# Altium PCB ZIF_to_2xZIF.PcbDoc (part 1 of 3)
Units mil, origin at the board's own origin, x right, y up, seen from the top; angles counter-clockwise.
Board outline 1622.05 x 16535.43 mil, 2 copper layers (Top Layer, Bottom Layer), stack 3.189 mil thick; 3 components, 51 nets, 153 pads, 51 vias.
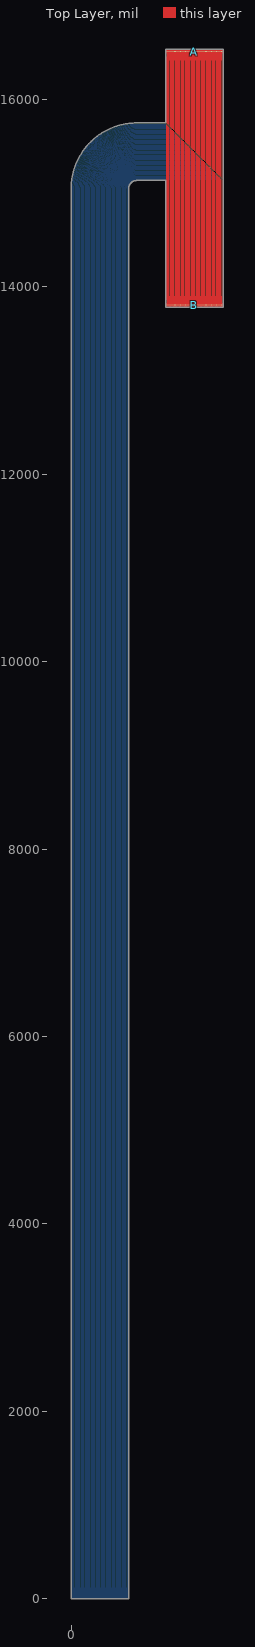
[diagram p0: Top Layer view]
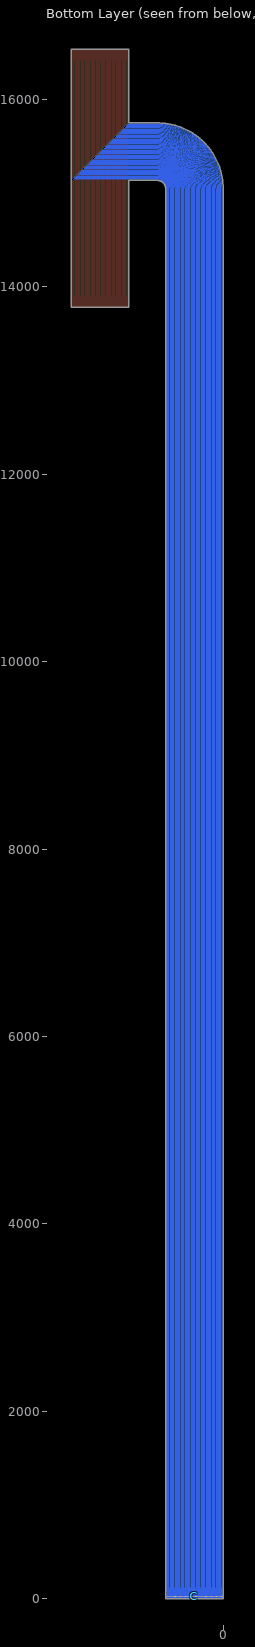
[diagram p1: Bottom Layer view, seen from below]

## Layer stack, top to bottom
Top Solder: solder mask 0.9843, Polyimide coverlay + adhesive, Dk 3.5
Top Layer: signal copper 0.7087
Polyimide core + adhesive: dielectric 1.7717, Polyimide + adhesive, Dk 3.5
Bottom Layer: signal copper 0.7087
Bottom Solder: solder mask 0.9843, Polyimide coverlay + adhesive, Dk 3.5

## Board outline
0,15047.24 0.11,15059.47 0.43,15071.7 0.96,15083.92 1.71,15096.13 2.67,15108.32 3.84,15120.5 5.22,15132.65 6.82,15144.77 8.63,15156.87 10.65,15168.93 12.88,15180.96 15.31,15192.95 17.96,15204.89 20.82,15216.78 23.88,15228.62 27.15,15240.41 30.62,15252.13 34.3,15263.8 38.18,15275.4 42.26,15286.93 46.55,15298.38 51.03,15309.76 55.71,15321.06 60.59,15332.28 65.66,15343.41 70.92,15354.45 76.38,15365.39 82.03,15376.24 87.86,15386.99 93.89,15397.64 100.1,15408.18 106.49,15418.6 113.06,15428.92 119.81,15439.12 126.74,15449.2 133.84,15459.16 141.11,15468.99 148.56,15478.69 156.17,15488.26 163.95,15497.7 171.9,15507 180,15516.16 188.26,15525.18 196.68,15534.05 205.26,15542.78 213.98,15551.35 222.85,15559.77 231.87,15568.03 241.03,15576.14 250.33,15584.08 259.77,15591.86 269.34,15599.47 279.04,15606.92 288.87,15614.19 298.83,15621.3 308.91,15628.22 319.11,15634.97 329.43,15641.55 339.86,15647.94 350.39,15654.14 361.04,15660.17 371.79,15666 382.64,15671.65 393.58,15677.11 404.62,15682.37 415.75,15687.45 426.97,15692.32 438.27,15697 449.65,15701.49 461.1,15705.77 472.63,15709.85 484.23,15713.73 495.9,15717.41 507.62,15720.88 519.41,15724.15 531.25,15727.22 543.14,15730.07 555.09,15732.72 567.07,15735.16 579.1,15737.39 591.16,15739.4 603.26,15741.21 615.38,15742.81 627.54,15744.19 639.71,15745.36 651.9,15746.32 664.11,15747.07 676.33,15747.6 688.56,15747.92 700.79,15748.03 1007.87,15748.03 1007.87,16535.43 1622.05,16535.43 1622.05,15748.03 1622.05,15133.86 1622.05,13779.53 1007.87,13779.53 1007.87,15133.86 700.79,15133.86 699.28,15133.85 697.76,15133.81 696.25,15133.74 694.75,15133.65 693.24,15133.53 691.73,15133.38 690.23,15133.21 688.73,15133.02 687.24,15132.79 685.75,15132.54 684.26,15132.27 682.78,15131.97 681.3,15131.64 679.83,15131.29 678.37,15130.91 676.91,15130.5 675.46,15130.07 674.02,15129.62 672.59,15129.14 671.16,15128.63 669.75,15128.11 668.34,15127.55 666.94,15126.97 665.56,15126.37 664.18,15125.74 662.82,15125.09 661.47,15124.42 660.12,15123.72 658.8,15123 657.48,15122.25 656.18,15121.49 654.89,15120.7 653.61,15119.88 652.35,15119.05 651.11,15118.19 649.88,15117.32 648.66,15116.42 647.46,15115.5 646.28,15114.56 645.11,15113.59 643.96,15112.61 642.83,15111.61 641.72,15110.59 640.62,15109.55 639.54,15108.49 638.48,15107.41 637.44,15106.31 636.42,15105.2 635.42,15104.07 634.44,15102.92 633.48,15101.75 632.53,15100.57 631.61,15099.37 630.72,15098.15 629.84,15096.92 628.98,15095.68 628.15,15094.42 627.33,15093.14 626.54,15091.85 625.78,15090.55 625.03,15089.24 624.31,15087.91 623.61,15086.57 622.94,15085.21 622.29,15083.85 621.66,15082.47 621.06,15081.09 620.48,15079.69 619.93,15078.28 619.4,15076.87 618.89,15075.44 618.41,15074.01 617.96,15072.57 617.53,15071.12 617.12,15069.66 616.75,15068.2 616.39,15066.73 616.07,15065.25 615.76,15063.77 615.49,15062.28 615.24,15060.79 615.02,15059.3 614.82,15057.8 614.65,15056.3 614.5,15054.79 614.38,15053.29 614.29,15051.78 614.23,15050.27 614.19,15048.76 614.17,15047.24 614.17,0 0,0

## Design rules (kind name [scope] priority, off if disabled: settings)
Clearance [All] p1: gap=2.78 ignorepadtopadclearanceinfootprint=FALSE
PolygonConnect [All] p1: connectstyle=Relief reliefconductorwidth=10 reliefentries=4 polygonreliefangle="90 Angle" airgapwidth=10
RoutingVias [All] p1: holewidth=28 width=50 viastyle="Through Hole" minholewidth=28 minwidth=50 maxholewidth=28 maxwidth=50
SolderMaskExpansion [All] p1: expansion=0 istentingtop=FALSE
Width [All] p1: maxlimit=11.81 minlimit=3.94 preferedwidth=10 toplayer_prefwidth=7.87 minimp=50.000000 maximp=50.000000 favimp=50.000000
30 further rules are at their usual default settings.

## Components (designator, comment, footprint, x,y, rotation, side; value= is the part's Value field where it differs from the comment)
A "Comment" FPC51_P030_STAGGERED#1 1314.96,16535.43 r0 top
B "Comment" FPC51_P030_STAGGERED#2 1314.96,13779.53 r0 top
C "Comment" FPC51_P030_STAGGERED#1 307.09,0 r0 bottom

## Footprints (in the part's own frame and the unit in brackets; to place one, negate y for a bottom-side part, rotate by r counter-clockwise, add the part's x,y. Pads: shape width x height; smd on the part's side, far side on the other; paste and mask are expansions set on the pad)
FPC51_P030_STAGGERED#1 [mm]
  rect 0.1x0.3 smd paste-2539.97 mask+0: 1(-7.5,-0.65) 2(-7.2,-0.65) 3(-6.9,-0.65) 4(-6.6,-0.65) 5(-6.3,-0.65) 6(-6,-0.65) 7(-5.7,-0.65) 8(-5.4,-0.65) 9(-5.1,-0.65) 10(-4.8,-0.65) 11(-4.5,-0.65) 12(-4.2,-0.65) 13(-3.9,-0.65) 14(-3.6,-0.65) 15(-3.3,-0.65) 16(-3,-0.65) 17(-2.7,-0.65) 18(-2.4,-0.65) 19(-2.1,-0.65) 20(-1.8,-0.65) 21(-1.5,-0.65) 22(-1.2,-0.65) 23(-0.9,-0.65) 24(-0.6,-0.65) 25(-0.3,-0.65) 26(0,-0.65) 27(0.3,-0.65) 28(0.6,-0.65) 29(0.9,-0.65) 30(1.2,-0.65) 31(1.5,-0.65) 32(1.8,-0.65) 33(2.1,-0.65) 34(2.4,-0.65) 35(2.7,-0.65) 36(3,-0.65) 37(3.3,-0.65) 38(3.6,-0.65) 39(3.9,-0.65) 40(4.2,-0.65) 41(4.5,-0.65) 42(4.8,-0.65) 43(5.1,-0.65) 44(5.4,-0.65) 45(5.7,-0.65) 46(6,-0.65) 47(6.3,-0.65) 48(6.6,-0.65) 49(6.9,-0.65) 50(7.2,-0.65) 51(7.5,-0.65)
  Top Layer region: 7.55,0 7.55,-0.15 7.65,-0.25 7.65,-1.1 7.55,-1.2 7.55,-2 7.6,-2.1 7.6,-3.05 7.4,-3.05 7.4,-2.1 7.45,-2 7.45,-1.2 7.35,-1.1 7.35,-0.25 7.45,-0.15 7.45,0
  Top Layer region: 7.25,0 7.25,-1.1 7.35,-1.2 7.35,-2 7.3,-2.1 7.3,-3.05 7.1,-3.05 7.1,-2.1 7.05,-2 7.05,-1.2 7.15,-1.1 7.15,0
  Top Layer region: 6.95,0 6.95,-0.15 7.05,-0.25 7.05,-1.1 6.95,-1.2 6.95,-2 7,-2.1 7,-3.05 6.8,-3.05 6.8,-2.1 6.85,-2 6.85,-1.2 6.75,-1.1 6.75,-0.25 6.85,-0.15 6.85,0
  Top Layer region: 6.65,0 6.65,-1.1 6.75,-1.2 6.75,-2 6.7,-2.1 6.7,-3.05 6.5,-3.05 6.5,-2.1 6.45,-2 6.45,-1.2 6.55,-1.1 6.55,0
  Top Layer region: 6.35,0 6.35,-0.15 6.45,-0.25 6.45,-1.1 6.35,-1.2 6.35,-2 6.4,-2.1 6.4,-3.05 6.2,-3.05 6.2,-2.1 6.25,-2 6.25,-1.2 6.15,-1.1 6.15,-0.25 6.25,-0.15 6.25,0
  Top Layer region: 6.05,0 6.05,-1.1 6.15,-1.2 6.15,-2 6.1,-2.1 6.1,-3.05 5.9,-3.05 5.9,-2.1 5.85,-2 5.85,-1.2 5.95,-1.1 5.95,0
  Top Layer region: 5.75,0 5.75,-0.15 5.85,-0.25 5.85,-1.1 5.75,-1.2 5.75,-2 5.8,-2.1 5.8,-3.05 5.6,-3.05 5.6,-2.1 5.65,-2 5.65,-1.2 5.55,-1.1 5.55,-0.25 5.65,-0.15 5.65,0
  Top Layer region: 5.45,0 5.45,-1.1 5.55,-1.2 5.55,-2 5.5,-2.1 5.5,-3.05 5.3,-3.05 5.3,-2.1 5.25,-2 5.25,-1.2 5.35,-1.1 5.35,0
  Top Layer region: 5.15,0 5.15,-0.15 5.25,-0.25 5.25,-1.1 5.15,-1.2 5.15,-2 5.2,-2.1 5.2,-3.05 5,-3.05 5,-2.1 5.05,-2 5.05,-1.2 4.95,-1.1 4.95,-0.25 5.05,-0.15 5.05,0
  Top Layer region: 4.85,0 4.85,-1.1 4.95,-1.2 4.95,-2 4.9,-2.1 4.9,-3.05 4.7,-3.05 4.7,-2.1 4.65,-2 4.65,-1.2 4.75,-1.1 4.75,0
  Top Layer region: 4.55,0 4.55,-0.15 4.65,-0.25 4.65,-1.1 4.55,-1.2 4.55,-2 4.6,-2.1 4.6,-3.05 4.4,-3.05 4.4,-2.1 4.45,-2 4.45,-1.2 4.35,-1.1 4.35,-0.25 4.45,-0.15 4.45,0
  Top Layer region: 4.25,0 4.25,-1.1 4.35,-1.2 4.35,-2 4.3,-2.1 4.3,-3.05 4.1,-3.05 4.1,-2.1 4.05,-2 4.05,-1.2 4.15,-1.1 4.15,0
  Top Layer region: 3.95,0 3.95,-0.15 4.05,-0.25 4.05,-1.1 3.95,-1.2 3.95,-2 4,-2.1 4,-3.05 3.8,-3.05 3.8,-2.1 3.85,-2 3.85,-1.2 3.75,-1.1 3.75,-0.25 3.85,-0.15 3.85,0
  Top Layer region: 3.65,0 3.65,-1.1 3.75,-1.2 3.75,-2 3.7,-2.1 3.7,-3.05 3.5,-3.05 3.5,-2.1 3.45,-2 3.45,-1.2 3.55,-1.1 3.55,0
  Top Layer region: 3.35,0 3.35,-0.15 3.45,-0.25 3.45,-1.1 3.35,-1.2 3.35,-2 3.4,-2.1 3.4,-3.05 3.2,-3.05 3.2,-2.1 3.25,-2 3.25,-1.2 3.15,-1.1 3.15,-0.25 3.25,-0.15 3.25,0
  Top Layer region: 3.05,0 3.05,-1.1 3.15,-1.2 3.15,-2 3.1,-2.1 3.1,-3.05 2.9,-3.05 2.9,-2.1 2.85,-2 2.85,-1.2 2.95,-1.1 2.95,0
  Top Layer region: 2.75,0 2.75,-0.15 2.85,-0.25 2.85,-1.1 2.75,-1.2 2.75,-2 2.8,-2.1 2.8,-3.05 2.6,-3.05 2.6,-2.1 2.65,-2 2.65,-1.2 2.55,-1.1 2.55,-0.25 2.65,-0.15 2.65,0
  Top Layer region: 2.45,0 2.45,-1.1 2.55,-1.2 2.55,-2 2.5,-2.1 2.5,-3.05 2.3,-3.05 2.3,-2.1 2.25,-2 2.25,-1.2 2.35,-1.1 2.35,0
  Top Layer region: 2.15,0 2.15,-0.15 2.25,-0.25 2.25,-1.1 2.15,-1.2 2.15,-2 2.2,-2.1 2.2,-3.05 2,-3.05 2,-2.1 2.05,-2 2.05,-1.2 1.95,-1.1 1.95,-0.25 2.05,-0.15 2.05,0
  Top Layer region: 1.85,0 1.85,-1.1 1.95,-1.2 1.95,-2 1.9,-2.1 1.9,-3.05 1.7,-3.05 1.7,-2.1 1.65,-2 1.65,-1.2 1.75,-1.1 1.75,0
  Top Layer region: 1.55,0 1.55,-0.15 1.65,-0.25 1.65,-1.1 1.55,-1.2 1.55,-2 1.6,-2.1 1.6,-3.05 1.4,-3.05 1.4,-2.1 1.45,-2 1.45,-1.2 1.35,-1.1 1.35,-0.25 1.45,-0.15 1.45,0
  Top Layer region: 1.25,0 1.25,-1.1 1.35,-1.2 1.35,-2 1.3,-2.1 1.3,-3.05 1.1,-3.05 1.1,-2.1 1.05,-2 1.05,-1.2 1.15,-1.1 1.15,0
  Top Layer region: 0.95,0 0.95,-0.15 1.05,-0.25 1.05,-1.1 0.95,-1.2 0.95,-2 1,-2.1 1,-3.05 0.8,-3.05 0.8,-2.1 0.85,-2 0.85,-1.2 0.75,-1.1 0.75,-0.25 0.85,-0.15 0.85,0
  Top Layer region: 0.65,0 0.65,-1.1 0.75,-1.2 0.75,-2 0.7,-2.1 0.7,-3.05 0.5,-3.05 0.5,-2.1 0.45,-2 0.45,-1.2 0.55,-1.1 0.55,0
  Top Layer region: 0.35,0 0.35,-0.15 0.45,-0.25 0.45,-1.1 0.35,-1.2 0.35,-2 0.4,-2.1 0.4,-3.05 0.2,-3.05 0.2,-2.1 0.25,-2 0.25,-1.2 0.15,-1.1 0.15,-0.25 0.25,-0.15 0.25,0
  Top Layer region: 0.05,0 0.05,-1.1 0.15,-1.2 0.15,-2 0.1,-2.1 0.1,-3.05 -0.1,-3.05 -0.1,-2.1 -0.15,-2 -0.15,-1.2 -0.05,-1.1 -0.05,0
  Top Layer region: -0.25,0 -0.25,-0.15 -0.15,-0.25 -0.15,-1.1 -0.25,-1.2 -0.25,-2 -0.2,-2.1 -0.2,-3.05 -0.4,-3.05 -0.4,-2.1 -0.35,-2 -0.35,-1.2 -0.45,-1.1 -0.45,-0.25 -0.35,-0.15 -0.35,0
  Top Layer region: -0.55,0 -0.55,-1.1 -0.45,-1.2 -0.45,-2 -0.5,-2.1 -0.5,-3.05 -0.7,-3.05 -0.7,-2.1 -0.75,-2 -0.75,-1.2 -0.65,-1.1 -0.65,0
  Top Layer region: -0.85,0 -0.85,-0.15 -0.75,-0.25 -0.75,-1.1 -0.85,-1.2 -0.85,-2 -0.8,-2.1 -0.8,-3.05 -1,-3.05 -1,-2.1 -0.95,-2 -0.95,-1.2 -1.05,-1.1 -1.05,-0.25 -0.95,-0.15 -0.95,0
  Top Layer region: -1.15,0 -1.15,-1.1 -1.05,-1.2 -1.05,-2 -1.1,-2.1 -1.1,-3.05 -1.3,-3.05 -1.3,-2.1 -1.35,-2 -1.35,-1.2 -1.25,-1.1 -1.25,0
  Top Layer region: -1.45,0 -1.45,-0.15 -1.35,-0.25 -1.35,-1.1 -1.45,-1.2 -1.45,-2 -1.4,-2.1 -1.4,-3.05 -1.6,-3.05 -1.6,-2.1 -1.55,-2 -1.55,-1.2 -1.65,-1.1 -1.65,-0.25 -1.55,-0.15 -1.55,0
  Top Layer region: -1.75,0 -1.75,-1.1 -1.65,-1.2 -1.65,-2 -1.7,-2.1 -1.7,-3.05 -1.9,-3.05 -1.9,-2.1 -1.95,-2 -1.95,-1.2 -1.85,-1.1 -1.85,0
  Top Layer region: -2.05,0 -2.05,-0.15 -1.95,-0.25 -1.95,-1.1 -2.05,-1.2 -2.05,-2 -2,-2.1 -2,-3.05 -2.2,-3.05 -2.2,-2.1 -2.15,-2 -2.15,-1.2 -2.25,-1.1 -2.25,-0.25 -2.15,-0.15 -2.15,0
  Top Layer region: -2.35,0 -2.35,-1.1 -2.25,-1.2 -2.25,-2 -2.3,-2.1 -2.3,-3.05 -2.5,-3.05 -2.5,-2.1 -2.55,-2 -2.55,-1.2 -2.45,-1.1 -2.45,0
  Top Layer region: -2.65,0 -2.65,-0.15 -2.55,-0.25 -2.55,-1.1 -2.65,-1.2 -2.65,-2 -2.6,-2.1 -2.6,-3.05 -2.8,-3.05 -2.8,-2.1 -2.75,-2 -2.75,-1.2 -2.85,-1.1 -2.85,-0.25 -2.75,-0.15 -2.75,0
  Top Layer region: -2.95,0 -2.95,-1.1 -2.85,-1.2 -2.85,-2 -2.9,-2.1 -2.9,-3.05 -3.1,-3.05 -3.1,-2.1 -3.15,-2 -3.15,-1.2 -3.05,-1.1 -3.05,0
  Top Layer region: -3.25,0 -3.25,-0.15 -3.15,-0.25 -3.15,-1.1 -3.25,-1.2 -3.25,-2 -3.2,-2.1 -3.2,-3.05 -3.4,-3.05 -3.4,-2.1 -3.35,-2 -3.35,-1.2 -3.45,-1.1 -3.45,-0.25 -3.35,-0.15 -3.35,0
  Top Layer region: -3.55,0 -3.55,-1.1 -3.45,-1.2 -3.45,-2 -3.5,-2.1 -3.5,-3.05 -3.7,-3.05 -3.7,-2.1 -3.75,-2 -3.75,-1.2 -3.65,-1.1 -3.65,0
  Top Layer region: -3.85,0 -3.85,-0.15 -3.75,-0.25 -3.75,-1.1 -3.85,-1.2 -3.85,-2 -3.8,-2.1 -3.8,-3.05 -4,-3.05 -4,-2.1 -3.95,-2 -3.95,-1.2 -4.05,-1.1 -4.05,-0.25 -3.95,-0.15 -3.95,0
  Top Layer region: -4.15,0 -4.15,-1.1 -4.05,-1.2 -4.05,-2 -4.1,-2.1 -4.1,-3.05 -4.3,-3.05 -4.3,-2.1 -4.35,-2 -4.35,-1.2 -4.25,-1.1 -4.25,0
  Top Layer region: -4.45,0 -4.45,-0.15 -4.35,-0.25 -4.35,-1.1 -4.45,-1.2 -4.45,-2 -4.4,-2.1 -4.4,-3.05 -4.6,-3.05 -4.6,-2.1 -4.55,-2 -4.55,-1.2 -4.65,-1.1 -4.65,-0.25 -4.55,-0.15 -4.55,0
  Top Layer region: -4.75,0 -4.75,-1.1 -4.65,-1.2 -4.65,-2 -4.7,-2.1 -4.7,-3.05 -4.9,-3.05 -4.9,-2.1 -4.95,-2 -4.95,-1.2 -4.85,-1.1 -4.85,0
  Top Layer region: -5.05,0 -5.05,-0.15 -4.95,-0.25 -4.95,-1.1 -5.05,-1.2 -5.05,-2 -5,-2.1 -5,-3.05 -5.2,-3.05 -5.2,-2.1 -5.15,-2 -5.15,-1.2 -5.25,-1.1 -5.25,-0.25 -5.15,-0.15 -5.15,0
  Top Layer region: -5.35,0 -5.35,-1.1 -5.25,-1.2 -5.25,-2 -5.3,-2.1 -5.3,-3.05 -5.5,-3.05 -5.5,-2.1 -5.55,-2 -5.55,-1.2 -5.45,-1.1 -5.45,0
  Top Layer region: -5.65,0 -5.65,-0.15 -5.55,-0.25 -5.55,-1.1 -5.65,-1.2 -5.65,-2 -5.6,-2.1 -5.6,-3.05 -5.8,-3.05 -5.8,-2.1 -5.75,-2 -5.75,-1.2 -5.85,-1.1 -5.85,-0.25 -5.75,-0.15 -5.75,0
  Top Layer region: -5.95,0 -5.95,-1.1 -5.85,-1.2 -5.85,-2 -5.9,-2.1 -5.9,-3.05 -6.1,-3.05 -6.1,-2.1 -6.15,-2 -6.15,-1.2 -6.05,-1.1 -6.05,0
  Top Layer region: -6.25,0 -6.25,-0.15 -6.15,-0.25 -6.15,-1.1 -6.25,-1.2 -6.25,-2 -6.2,-2.1 -6.2,-3.05 -6.4,-3.05 -6.4,-2.1 -6.35,-2 -6.35,-1.2 -6.45,-1.1 -6.45,-0.25 -6.35,-0.15 -6.35,0
  Top Layer region: -6.55,0 -6.55,-1.1 -6.45,-1.2 -6.45,-2 -6.5,-2.1 -6.5,-3.05 -6.7,-3.05 -6.7,-2.1 -6.75,-2 -6.75,-1.2 -6.65,-1.1 -6.65,0
  Top Layer region: -6.85,0 -6.85,-0.15 -6.75,-0.25 -6.75,-1.1 -6.85,-1.2 -6.85,-2 -6.8,-2.1 -6.8,-3.05 -7,-3.05 -7,-2.1 -6.95,-2 -6.95,-1.2 -7.05,-1.1 -7.05,-0.25 -6.95,-0.15 -6.95,0
  Top Layer region: -7.15,0 -7.15,-1.1 -7.05,-1.2 -7.05,-2 -7.1,-2.1 -7.1,-3.05 -7.3,-3.05 -7.3,-2.1 -7.35,-2 -7.35,-1.2 -7.25,-1.1 -7.25,0
  Top Layer region: -7.45,0 -7.45,-0.15 -7.35,-0.25 -7.35,-1.1 -7.45,-1.2 -7.45,-2 -7.4,-2.1 -7.4,-3.05 -7.6,-3.05 -7.6,-2.1 -7.55,-2 -7.55,-1.2 -7.65,-1.1 -7.65,-0.25 -7.55,-0.15 -7.55,0
FPC51_P030_STAGGERED#2 [mm]
  rect 0.1x0.3 smd paste-2539.97 mask+0: 1(-7.5,0.65) 2(-7.2,0.65) 3(-6.9,0.65) 4(-6.6,0.65) 5(-6.3,0.65) 6(-6,0.65) 7(-5.7,0.65) 8(-5.4,0.65) 9(-5.1,0.65) 10(-4.8,0.65) 11(-4.5,0.65) 12(-4.2,0.65) 13(-3.9,0.65) 14(-3.6,0.65) 15(-3.3,0.65) 16(-3,0.65) 17(-2.7,0.65) 18(-2.4,0.65) 19(-2.1,0.65) 20(-1.8,0.65) 21(-1.5,0.65) 22(-1.2,0.65) 23(-0.9,0.65) 24(-0.6,0.65) 25(-0.3,0.65) 26(0,0.65) 27(0.3,0.65) 28(0.6,0.65) 29(0.9,0.65) 30(1.2,0.65) 31(1.5,0.65) 32(1.8,0.65) 33(2.1,0.65) 34(2.4,0.65) 35(2.7,0.65) 36(3,0.65) 37(3.3,0.65) 38(3.6,0.65) 39(3.9,0.65) 40(4.2,0.65) 41(4.5,0.65) 42(4.8,0.65) 43(5.1,0.65) 44(5.4,0.65) 45(5.7,0.65) 46(6,0.65) 47(6.3,0.65) 48(6.6,0.65) 49(6.9,0.65) 50(7.2,0.65) 51(7.5,0.65)
  Top Layer region: 7.55,0 7.55,0.15 7.65,0.25 7.65,1.1 7.55,1.2 7.55,2 7.6,2.1 7.6,3.05 7.4,3.05 7.4,2.1 7.45,2 7.45,1.2 7.35,1.1 7.35,0.25 7.45,0.15 7.45,0
  Top Layer region: 7.25,0 7.25,1.1 7.35,1.2 7.35,2 7.3,2.1 7.3,3.05 7.1,3.05 7.1,2.1 7.05,2 7.05,1.2 7.15,1.1 7.15,0
  Top Layer region: 6.95,0 6.95,0.15 7.05,0.25 7.05,1.1 6.95,1.2 6.95,2 7,2.1 7,3.05 6.8,3.05 6.8,2.1 6.85,2 6.85,1.2 6.75,1.1 6.75,0.25 6.85,0.15 6.85,0
  Top Layer region: 6.65,0 6.65,1.1 6.75,1.2 6.75,2 6.7,2.1 6.7,3.05 6.5,3.05 6.5,2.1 6.45,2 6.45,1.2 6.55,1.1 6.55,0
  Top Layer region: 6.35,0 6.35,0.15 6.45,0.25 6.45,1.1 6.35,1.2 6.35,2 6.4,2.1 6.4,3.05 6.2,3.05 6.2,2.1 6.25,2 6.25,1.2 6.15,1.1 6.15,0.25 6.25,0.15 6.25,0
  Top Layer region: 6.05,0 6.05,1.1 6.15,1.2 6.15,2 6.1,2.1 6.1,3.05 5.9,3.05 5.9,2.1 5.85,2 5.85,1.2 5.95,1.1 5.95,0
  Top Layer region: 5.75,0 5.75,0.15 5.85,0.25 5.85,1.1 5.75,1.2 5.75,2 5.8,2.1 5.8,3.05 5.6,3.05 5.6,2.1 5.65,2 5.65,1.2 5.55,1.1 5.55,0.25 5.65,0.15 5.65,0
  Top Layer region: 5.45,0 5.45,1.1 5.55,1.2 5.55,2 5.5,2.1 5.5,3.05 5.3,3.05 5.3,2.1 5.25,2 5.25,1.2 5.35,1.1 5.35,0
  Top Layer region: 5.15,0 5.15,0.15 5.25,0.25 5.25,1.1 5.15,1.2 5.15,2 5.2,2.1 5.2,3.05 5,3.05 5,2.1 5.05,2 5.05,1.2 4.95,1.1 4.95,0.25 5.05,0.15 5.05,0
  Top Layer region: 4.85,0 4.85,1.1 4.95,1.2 4.95,2 4.9,2.1 4.9,3.05 4.7,3.05 4.7,2.1 4.65,2 4.65,1.2 4.75,1.1 4.75,0
  Top Layer region: 4.55,0 4.55,0.15 4.65,0.25 4.65,1.1 4.55,1.2 4.55,2 4.6,2.1 4.6,3.05 4.4,3.05 4.4,2.1 4.45,2 4.45,1.2 4.35,1.1 4.35,0.25 4.45,0.15 4.45,0
  Top Layer region: 4.25,0 4.25,1.1 4.35,1.2 4.35,2 4.3,2.1 4.3,3.05 4.1,3.05 4.1,2.1 4.05,2 4.05,1.2 4.15,1.1 4.15,0
  Top Layer region: 3.95,0 3.95,0.15 4.05,0.25 4.05,1.1 3.95,1.2 3.95,2 4,2.1 4,3.05 3.8,3.05 3.8,2.1 3.85,2 3.85,1.2 3.75,1.1 3.75,0.25 3.85,0.15 3.85,0
  Top Layer region: 3.65,0 3.65,1.1 3.75,1.2 3.75,2 3.7,2.1 3.7,3.05 3.5,3.05 3.5,2.1 3.45,2 3.45,1.2 3.55,1.1 3.55,0
  Top Layer region: 3.35,0 3.35,0.15 3.45,0.25 3.45,1.1 3.35,1.2 3.35,2 3.4,2.1 3.4,3.05 3.2,3.05 3.2,2.1 3.25,2 3.25,1.2 3.15,1.1 3.15,0.25 3.25,0.15 3.25,0
  Top Layer region: 3.05,0 3.05,1.1 3.15,1.2 3.15,2 3.1,2.1 3.1,3.05 2.9,3.05 2.9,2.1 2.85,2 2.85,1.2 2.95,1.1 2.95,0
  Top Layer region: 2.75,0 2.75,0.15 2.85,0.25 2.85,1.1 2.75,1.2 2.75,2 2.8,2.1 2.8,3.05 2.6,3.05 2.6,2.1 2.65,2 2.65,1.2 2.55,1.1 2.55,0.25 2.65,0.15 2.65,0
  Top Layer region: 2.45,0 2.45,1.1 2.55,1.2 2.55,2 2.5,2.1 2.5,3.05 2.3,3.05 2.3,2.1 2.25,2 2.25,1.2 2.35,1.1 2.35,0
  Top Layer region: 2.15,0 2.15,0.15 2.25,0.25 2.25,1.1 2.15,1.2 2.15,2 2.2,2.1 2.2,3.05 2,3.05 2,2.1 2.05,2 2.05,1.2 1.95,1.1 1.95,0.25 2.05,0.15 2.05,0
  Top Layer region: 1.85,0 1.85,1.1 1.95,1.2 1.95,2 1.9,2.1 1.9,3.05 1.7,3.05 1.7,2.1 1.65,2 1.65,1.2 1.75,1.1 1.75,0
  Top Layer region: 1.55,0 1.55,0.15 1.65,0.25 1.65,1.1 1.55,1.2 1.55,2 1.6,2.1 1.6,3.05 1.4,3.05 1.4,2.1 1.45,2 1.45,1.2 1.35,1.1 1.35,0.25 1.45,0.15 1.45,0
  Top Layer region: 1.25,0 1.25,1.1 1.35,1.2 1.35,2 1.3,2.1 1.3,3.05 1.1,3.05 1.1,2.1 1.05,2 1.05,1.2 1.15,1.1 1.15,0
  Top Layer region: 0.95,0 0.95,0.15 1.05,0.25 1.05,1.1 0.95,1.2 0.95,2 1,2.1 1,3.05 0.8,3.05 0.8,2.1 0.85,2 0.85,1.2 0.75,1.1 0.75,0.25 0.85,0.15 0.85,0
  Top Layer region: 0.65,0 0.65,1.1 0.75,1.2 0.75,2 0.7,2.1 0.7,3.05 0.5,3.05 0.5,2.1 0.45,2 0.45,1.2 0.55,1.1 0.55,0
  Top Layer region: 0.35,0 0.35,0.15 0.45,0.25 0.45,1.1 0.35,1.2 0.35,2 0.4,2.1 0.4,3.05 0.2,3.05 0.2,2.1 0.25,2 0.25,1.2 0.15,1.1 0.15,0.25 0.25,0.15 0.25,0
  Top Layer region: 0.05,0 0.05,1.1 0.15,1.2 0.15,2 0.1,2.1 0.1,3.05 -0.1,3.05 -0.1,2.1 -0.15,2 -0.15,1.2 -0.05,1.1 -0.05,0
  Top Layer region: -0.25,0 -0.25,0.15 -0.15,0.25 -0.15,1.1 -0.25,1.2 -0.25,2 -0.2,2.1 -0.2,3.05 -0.4,3.05 -0.4,2.1 -0.35,2 -0.35,1.2 -0.45,1.1 -0.45,0.25 -0.35,0.15 -0.35,0
  Top Layer region: -0.55,0 -0.55,1.1 -0.45,1.2 -0.45,2 -0.5,2.1 -0.5,3.05 -0.7,3.05 -0.7,2.1 -0.75,2 -0.75,1.2 -0.65,1.1 -0.65,0
  Top Layer region: -0.85,0 -0.85,0.15 -0.75,0.25 -0.75,1.1 -0.85,1.2 -0.85,2 -0.8,2.1 -0.8,3.05 -1,3.05 -1,2.1 -0.95,2 -0.95,1.2 -1.05,1.1 -1.05,0.25 -0.95,0.15 -0.95,0
  Top Layer region: -1.15,0 -1.15,1.1 -1.05,1.2 -1.05,2 -1.1,2.1 -1.1,3.05 -1.3,3.05 -1.3,2.1 -1.35,2 -1.35,1.2 -1.25,1.1 -1.25,0
  Top Layer region: -1.45,0 -1.45,0.15 -1.35,0.25 -1.35,1.1 -1.45,1.2 -1.45,2 -1.4,2.1 -1.4,3.05 -1.6,3.05 -1.6,2.1 -1.55,2 -1.55,1.2 -1.65,1.1 -1.65,0.25 -1.55,0.15 -1.55,0
  Top Layer region: -1.75,0 -1.75,1.1 -1.65,1.2 -1.65,2 -1.7,2.1 -1.7,3.05 -1.9,3.05 -1.9,2.1 -1.95,2 -1.95,1.2 -1.85,1.1 -1.85,0
  Top Layer region: -2.05,0 -2.05,0.15 -1.95,0.25 -1.95,1.1 -2.05,1.2 -2.05,2 -2,2.1 -2,3.05 -2.2,3.05 -2.2,2.1 -2.15,2 -2.15,1.2 -2.25,1.1 -2.25,0.25 -2.15,0.15 -2.15,0
  Top Layer region: -2.35,0 -2.35,1.1 -2.25,1.2 -2.25,2 -2.3,2.1 -2.3,3.05 -2.5,3.05 -2.5,2.1 -2.55,2 -2.55,1.2 -2.45,1.1 -2.45,0
  Top Layer region: -2.65,0 -2.65,0.15 -2.55,0.25 -2.55,1.1 -2.65,1.2 -2.65,2 -2.6,2.1 -2.6,3.05 -2.8,3.05 -2.8,2.1 -2.75,2 -2.75,1.2 -2.85,1.1 -2.85,0.25 -2.75,0.15 -2.75,0
  Top Layer region: -2.95,0 -2.95,1.1 -2.85,1.2 -2.85,2 -2.9,2.1 -2.9,3.05 -3.1,3.05 -3.1,2.1 -3.15,2 -3.15,1.2 -3.05,1.1 -3.05,0
  Top Layer region: -3.25,0 -3.25,0.15 -3.15,0.25 -3.15,1.1 -3.25,1.2 -3.25,2 -3.2,2.1 -3.2,3.05 -3.4,3.05 -3.4,2.1 -3.35,2 -3.35,1.2 -3.45,1.1 -3.45,0.25 -3.35,0.15 -3.35,0
  Top Layer region: -3.55,0 -3.55,1.1 -3.45,1.2 -3.45,2 -3.5,2.1 -3.5,3.05 -3.7,3.05 -3.7,2.1 -3.75,2 -3.75,1.2 -3.65,1.1 -3.65,0
  Top Layer region: -3.85,0 -3.85,0.15 -3.75,0.25 -3.75,1.1 -3.85,1.2 -3.85,2 -3.8,2.1 -3.8,3.05 -4,3.05 -4,2.1 -3.95,2 -3.95,1.2 -4.05,1.1 -4.05,0.25 -3.95,0.15 -3.95,0
  Top Layer region: -4.15,0 -4.15,1.1 -4.05,1.2 -4.05,2 -4.1,2.1 -4.1,3.05 -4.3,3.05 -4.3,2.1 -4.35,2 -4.35,1.2 -4.25,1.1 -4.25,0
  Top Layer region: -4.45,0 -4.45,0.15 -4.35,0.25 -4.35,1.1 -4.45,1.2 -4.45,2 -4.4,2.1 -4.4,3.05 -4.6,3.05 -4.6,2.1 -4.55,2 -4.55,1.2 -4.65,1.1 -4.65,0.25 -4.55,0.15 -4.55,0
  Top Layer region: -4.75,0 -4.75,1.1 -4.65,1.2 -4.65,2 -4.7,2.1 -4.7,3.05 -4.9,3.05 -4.9,2.1 -4.95,2 -4.95,1.2 -4.85,1.1 -4.85,0
  Top Layer region: -5.05,0 -5.05,0.15 -4.95,0.25 -4.95,1.1 -5.05,1.2 -5.05,2 -5,2.1 -5,3.05 -5.2,3.05 -5.2,2.1 -5.15,2 -5.15,1.2 -5.25,1.1 -5.25,0.25 -5.15,0.15 -5.15,0
  Top Layer region: -5.35,0 -5.35,1.1 -5.25,1.2 -5.25,2 -5.3,2.1 -5.3,3.05 -5.5,3.05 -5.5,2.1 -5.55,2 -5.55,1.2 -5.45,1.1 -5.45,0
  Top Layer region: -5.65,0 -5.65,0.15 -5.55,0.25 -5.55,1.1 -5.65,1.2 -5.65,2 -5.6,2.1 -5.6,3.05 -5.8,3.05 -5.8,2.1 -5.75,2 -5.75,1.2 -5.85,1.1 -5.85,0.25 -5.75,0.15 -5.75,0
  Top Layer region: -5.95,0 -5.95,1.1 -5.85,1.2 -5.85,2 -5.9,2.1 -5.9,3.05 -6.1,3.05 -6.1,2.1 -6.15,2 -6.15,1.2 -6.05,1.1 -6.05,0
  Top Layer region: -6.25,0 -6.25,0.15 -6.15,0.25 -6.15,1.1 -6.25,1.2 -6.25,2 -6.2,2.1 -6.2,3.05 -6.4,3.05 -6.4,2.1 -6.35,2 -6.35,1.2 -6.45,1.1 -6.45,0.25 -6.35,0.15 -6.35,0
  Top Layer region: -6.55,0 -6.55,1.1 -6.45,1.2 -6.45,2 -6.5,2.1 -6.5,3.05 -6.7,3.05 -6.7,2.1 -6.75,2 -6.75,1.2 -6.65,1.1 -6.65,0
  Top Layer region: -6.85,0 -6.85,0.15 -6.75,0.25 -6.75,1.1 -6.85,1.2 -6.85,2 -6.8,2.1 -6.8,3.05 -7,3.05 -7,2.1 -6.95,2 -6.95,1.2 -7.05,1.1 -7.05,0.25 -6.95,0.15 -6.95,0
  Top Layer region: -7.15,0 -7.15,1.1 -7.05,1.2 -7.05,2 -7.1,2.1 -7.1,3.05 -7.3,3.05 -7.3,2.1 -7.35,2 -7.35,1.2 -7.25,1.1 -7.25,0
  Top Layer region: -7.45,0 -7.45,0.15 -7.35,0.25 -7.35,1.1 -7.45,1.2 -7.45,2 -7.4,2.1 -7.4,3.05 -7.6,3.05 -7.6,2.1 -7.55,2 -7.55,1.2 -7.65,1.1 -7.65,0.25 -7.55,0.15 -7.55,0

## Part data
A B C: library part FPC51_P030_STAGGERED

## Via types
v1: diameter 11.81, hole 3.94, Top Layer to Bottom Layer, 51 vias

## Nets (pads, with @x,y where several pads share a name; then routed paths per layer and width w, separated by ;. In a path a pad name is that pad's centre, name@x,y a point inside that pad or via, vN(x,y) a via of type N, cw(c..) or ccw(c..) an arc to the next point about the centre after c; other vN are vias at no path point)
FPC_01: A.1 B.1 C.1 | length 18844
  Top Layer w3.94: 1019.68,15110.24 1019.68,15759.84
  Top Layer w7.87: 1019.68,13899.61 1019.68,15110.24 ; 1019.68,15759.84 1019.68,16415.35
  Bottom Layer w3.94: 11.81,14881.89 11.81,15047.24 11.92,15059.27 12.23,15071.29 12.76,15083.3 13.49,15095.3 14.43,15107.29 15.59,15119.26 16.95,15131.21 18.52,15143.13 20.29,15155.02 22.28,15166.88 24.47,15178.71 26.87,15190.49 29.47,15202.23 32.28,15213.92 35.29,15225.56 38.5,15237.15 41.92,15248.68 45.53,15260.15 49.35,15271.55 53.36,15282.89 57.57,15294.15 61.98,15305.34 66.58,15316.45 71.38,15327.48 76.36,15338.42 81.54,15349.27 86.91,15360.03 92.46,15370.7 98.2,15381.27 104.12,15391.73 110.22,15402.09 116.5,15412.35 122.96,15422.49 129.6,15432.51 136.41,15442.42 143.39,15452.21 150.55,15461.88 157.87,15471.42 165.35,15480.83 173,15490.11 180.81,15499.25 188.78,15508.26 196.9,15517.12 205.18,15525.85 213.61,15534.42 222.18,15542.85 230.91,15551.13 239.77,15559.25 248.78,15567.22 257.92,15575.03 267.2,15582.68 276.61,15590.16 286.15,15597.49 295.82,15604.64 305.61,15611.62 315.52,15618.43 325.54,15625.07 335.69,15631.53 345.94,15637.81 356.3,15643.92 366.76,15649.84 377.33,15655.57 388,15661.13 398.76,15666.49 409.61,15671.67 420.56,15676.66 431.58,15681.45 442.69,15686.05 453.88,15690.46 465.14,15694.67 476.48,15698.68 487.88,15702.5 499.35,15706.12 510.88,15709.53 522.47,15712.74 534.11,15715.75 545.8,15718.56 557.54,15721.16 569.32,15723.56 581.15,15725.75 593.01,15727.74 604.9,15729.52 616.82,15731.08 628.77,15732.45 640.74,15733.6 652.73,15734.54 664.73,15735.28 676.74,15735.8 688.76,15736.12 700.79,15736.22 v1(1019.68,15736.22)
  Bottom Layer w7.87: 11.81,120.08 11.81,14881.89
FPC_02: A.2 B.2 C.2 | length 18837.3
  Top Layer w3.94: 1031.5,15110.24 1031.5,15759.84
  Top Layer w7.87: 1031.5,13899.61 1031.5,15110.24 ; 1031.5,15759.84 1031.5,16415.35
  Bottom Layer w3.94: 23.62,14881.89 23.62,15047.24 23.73,15059.06 24.03,15070.88 24.55,15082.68 25.27,15094.48 26.2,15106.26 27.33,15118.03 28.67,15129.77 30.21,15141.49 31.96,15153.18 33.91,15164.83 36.06,15176.45 38.42,15188.03 40.98,15199.57 43.74,15211.07 46.7,15222.51 49.85,15233.9 53.21,15245.23 56.76,15256.5 60.52,15267.71 64.46,15278.85 68.6,15289.92 72.93,15300.91 77.45,15311.83 82.17,15322.67 87.07,15333.43 92.16,15344.09 97.43,15354.67 102.89,15365.15 108.53,15375.54 114.34,15385.83 120.34,15396.01 126.52,15406.09 132.87,15416.05 139.39,15425.91 146.09,15435.65 152.95,15445.27 159.98,15454.77 167.17,15464.15 174.53,15473.4 182.05,15482.52 189.72,15491.5 197.56,15500.36 205.54,15509.07 213.68,15517.64 221.96,15526.07 230.39,15534.36 238.96,15542.49 247.68,15550.48 256.53,15558.31 265.51,15565.98 274.63,15573.5 283.88,15580.86 293.26,15588.05 302.76,15595.08 312.38,15601.95 322.12,15608.64 331.98,15615.16 341.94,15621.51 352.02,15627.69 362.2,15633.69 372.49,15639.51 382.88,15645.15 393.36,15650.6 403.94,15655.88 414.61,15660.96 425.36,15665.87 436.2,15670.58 447.12,15675.1 458.11,15679.43 469.18,15683.57 480.32,15687.52 491.53,15691.27 502.8,15694.82 514.14,15698.18 525.52,15701.34 536.97,15704.29 548.46,15707.05 560,15709.61 571.58,15711.97 583.2,15714.12 594.86,15716.07 606.54,15717.82 618.26,15719.36 630,15720.7 641.77,15721.83 653.55,15722.76 665.35,15723.48 677.15,15724 688.97,15724.31 700.79,15724.41 v1(1031.5,15724.41)
  Bottom Layer w7.87: 23.62,120.08 23.62,14881.89
FPC_03: A.3 B.3 C.3 | length 18830.6
  Top Layer w3.94: 1043.31,15110.24 1043.31,15759.84
  Top Layer w7.87: 1043.31,13899.61 1043.31,15110.24 ; 1043.31,15759.84 1043.31,16415.35
  Bottom Layer w3.94: 35.43,14881.89 35.43,15047.24 35.53,15058.86 35.84,15070.46 36.34,15082.07 37.05,15093.66 37.96,15105.23 39.08,15116.79 40.39,15128.33 41.91,15139.84 43.62,15151.33 45.54,15162.78 47.66,15174.2 49.97,15185.58 52.49,15196.92 55.2,15208.21 58.1,15219.45 61.21,15230.64 64.51,15241.77 68,15252.85 71.68,15263.86 75.56,15274.81 79.63,15285.69 83.88,15296.49 88.33,15307.22 92.96,15317.87 97.77,15328.43 102.77,15338.92 107.95,15349.31 113.31,15359.61 118.86,15369.81 124.57,15379.92 130.47,15389.93 136.53,15399.83 142.77,15409.62 149.18,15419.31 155.76,15428.88 162.5,15438.33 169.41,15447.66 176.48,15456.88 183.71,15465.97 191.1,15474.93 198.64,15483.76 206.33,15492.45 214.18,15501.01 222.17,15509.44 230.31,15517.72 238.59,15525.86 247.02,15533.85 255.58,15541.7 264.28,15549.39 273.11,15556.94 282.07,15564.32 291.15,15571.55 300.37,15578.62 309.7,15585.53 319.16,15592.27 328.73,15598.85 338.41,15605.26 348.2,15611.5 358.1,15617.56 368.11,15623.46 378.22,15629.18 388.42,15634.72 398.72,15640.08 409.12,15645.26 419.6,15650.26 430.16,15655.08 440.81,15659.71 451.54,15664.15 462.35,15668.41 473.22,15672.47 484.17,15676.35 495.18,15680.03 506.26,15683.53 517.39,15686.82 528.58,15689.93 539.82,15692.83 551.12,15695.55 562.45,15698.06 573.83,15700.37 585.25,15702.49 596.7,15704.41 608.19,15706.12 619.7,15707.64 631.24,15708.95 642.8,15710.07 654.37,15710.98 665.97,15711.69 677.57,15712.19 689.18,15712.5 700.79,15712.6 v1(1043.31,15712.6)
  Bottom Layer w7.87: 35.43,120.08 35.43,14881.89
FPC_04: A.4 B.4 C.4 | length 18823.8
  Top Layer w3.94: 1055.12,15110.24 1055.12,15759.84
  Top Layer w7.87: 1055.12,13899.61 1055.12,15110.24 ; 1055.12,15759.84 1055.12,16415.35
  Bottom Layer w3.94: 47.24,14881.89 47.24,15047.24 47.34,15058.65 47.64,15070.05 48.14,15081.45 48.84,15092.83 49.73,15104.2 50.82,15115.56 52.12,15126.89 53.6,15138.2 55.29,15149.48 57.17,15160.73 59.25,15171.95 61.53,15183.12 63.99,15194.26 66.66,15205.35 69.51,15216.39 72.56,15227.39 75.8,15238.32 79.23,15249.2 82.85,15260.02 86.66,15270.77 90.65,15281.45 94.83,15292.07 99.2,15302.6 103.75,15313.06 108.48,15323.44 113.39,15333.74 118.48,15343.95 123.74,15354.06 129.19,15364.09 134.8,15374.02 140.59,15383.84 146.55,15393.57 152.68,15403.19 158.98,15412.7 165.44,15422.1 172.06,15431.39 178.84,15440.56 185.79,15449.61 192.89,15458.53 200.14,15467.33 207.55,15476.01 215.11,15484.55 222.82,15492.96 230.67,15501.23 238.66,15509.37 246.8,15517.36 255.07,15525.22 263.48,15532.92 272.02,15540.48 280.7,15547.89 289.5,15555.14 298.43,15562.24 307.48,15569.19 316.64,15575.97 325.93,15582.6 335.33,15589.06 344.84,15595.35 354.46,15601.48 364.19,15607.44 374.02,15613.23 383.94,15618.85 393.97,15624.29 404.08,15629.56 414.29,15634.64 424.59,15639.56 434.97,15644.29 445.43,15648.83 455.97,15653.2 466.58,15657.38 477.26,15661.37 488.01,15665.18 498.83,15668.8 509.71,15672.23 520.65,15675.47 531.64,15678.52 542.68,15681.37 553.77,15684.04 564.91,15686.51 576.09,15688.78 587.3,15690.86 598.55,15692.74 609.83,15694.43 621.14,15695.92 632.47,15697.21 643.83,15698.3 655.2,15699.2 666.58,15699.89 677.98,15700.39 689.38,15700.69 700.79,15700.79 v1(1055.12,15700.79)
  Bottom Layer w7.87: 47.24,120.08 47.24,14881.89
FPC_05: A.5 B.5 C.5 | length 18817.1
  Top Layer w3.94: 1066.93,15110.24 1066.93,15759.84
  Top Layer w7.87: 1066.93,13899.61 1066.93,15110.24 ; 1066.93,15759.84 1066.93,16415.35
  Bottom Layer w3.94: 59.06,14881.89 59.06,15047.24 59.15,15058.44 59.45,15069.64 59.93,15080.83 60.62,15092.01 61.5,15103.17 62.57,15114.32 63.84,15125.45 65.3,15136.56 66.96,15147.63 68.8,15158.68 70.85,15169.69 73.08,15180.67 75.5,15191.6 78.12,15202.49 80.92,15213.34 83.91,15224.13 87.1,15234.87 90.46,15245.55 94.02,15256.17 97.76,15266.73 101.68,15277.22 105.78,15287.64 110.07,15297.99 114.54,15308.26 119.18,15318.45 124,15328.56 129,15338.58 134.17,15348.52 139.52,15358.36 145.03,15368.11 150.72,15377.76 156.57,15387.31 162.59,15396.76 168.77,15406.1 175.11,15415.33 181.62,15424.44 188.28,15433.45 195.1,15442.33 202.07,15451.1 209.19,15459.74 216.47,15468.26 223.89,15476.65 231.45,15484.9 239.16,15493.03 247.01,15501.02 255,15508.87 263.13,15516.58 271.38,15524.14 279.77,15531.57 288.29,15538.84 296.93,15545.96 305.7,15552.94 314.58,15559.75 323.59,15566.42 332.7,15572.92 341.94,15579.26 351.27,15585.45 360.72,15591.46 370.27,15597.32 379.92,15603 389.67,15608.52 399.51,15613.86 409.45,15619.03 419.47,15624.03 429.58,15628.85 439.77,15633.5 450.04,15637.96 460.39,15642.25 470.81,15646.35 481.3,15650.28 491.86,15654.01 502.48,15657.57 513.16,15660.94 523.9,15664.12 534.69,15667.11 545.54,15669.91 556.43,15672.53 567.36,15674.95 578.34,15677.19 589.35,15679.23 600.4,15681.08 611.48,15682.73 622.58,15684.19 633.71,15685.46 644.86,15686.53 656.02,15687.41 667.2,15688.1 678.39,15688.59 689.59,15688.88 700.79,15688.98 v1(1066.93,15688.98)
  Bottom Layer w7.87: 59.06,120.08 59.06,14881.89
FPC_06: A.6 B.6 C.6 | length 18810.3
  Top Layer w3.94: 1078.74,15110.24 1078.74,15759.84
  Top Layer w7.87: 1078.74,13899.61 1078.74,15110.24 ; 1078.74,15759.84 1078.74,16415.35
  Bottom Layer w3.94: 70.87,14881.89 70.87,15047.24 70.96,15058.24 71.25,15069.23 71.73,15080.21 72.4,15091.19 73.26,15102.15 74.32,15113.09 75.56,15124.01 77,15134.91 78.62,15145.79 80.44,15156.63 82.44,15167.44 84.63,15178.21 87.01,15188.95 89.58,15199.64 92.33,15210.28 95.27,15220.87 98.39,15231.42 101.7,15241.9 105.19,15252.33 108.86,15262.69 112.71,15272.99 116.73,15283.22 120.94,15293.37 125.33,15303.46 129.88,15313.46 134.62,15323.38 139.52,15333.22 144.6,15342.97 149.85,15352.64 155.26,15362.2 160.84,15371.68 166.58,15381.05 172.49,15390.32 178.56,15399.49 184.79,15408.55 191.17,15417.5 197.71,15426.34 204.4,15435.06 211.25,15443.67 218.24,15452.15 225.38,15460.51 232.66,15468.74 240.09,15476.85 247.66,15484.82 255.37,15492.67 263.21,15500.37 271.18,15507.94 279.29,15515.37 287.52,15522.65 295.88,15529.79 304.37,15536.78 312.97,15543.63 321.69,15550.32 330.53,15556.86 339.48,15563.25 348.54,15569.47 357.71,15575.54 366.98,15581.45 376.35,15587.19 385.83,15592.77 395.4,15598.19 405.06,15603.43 414.81,15608.51 424.65,15613.41 434.57,15618.15 444.58,15622.71 454.66,15627.09 464.81,15631.3 475.04,15635.33 485.34,15639.18 495.71,15642.85 506.13,15646.33 516.62,15649.64 527.16,15652.76 537.75,15655.7 548.4,15658.45 559.09,15661.02 569.82,15663.4 580.59,15665.59 591.4,15667.6 602.25,15669.41 613.12,15671.03 624.02,15672.47 634.94,15673.71 645.89,15674.77 656.85,15675.63 667.82,15676.3 678.8,15676.78 689.79,15677.07 700.79,15677.17 v1(1078.74,15677.17)
  Bottom Layer w7.87: 70.87,120.08 70.87,14881.89
FPC_07: A.7 B.7 C.7 | length 18803.6
  Top Layer w3.94: 1090.55,15110.24 1090.55,15759.84
  Top Layer w7.87: 1090.55,13899.61 1090.55,15110.24 ; 1090.55,15759.84 1090.55,16415.35
  Bottom Layer w3.94: 82.68,14881.89 82.68,15047.24 82.77,15058.03 83.05,15068.82 83.52,15079.59 84.18,15090.36 85.03,15101.12 86.06,15111.85 87.28,15122.57 88.69,15133.27 90.29,15143.94 92.07,15154.58 94.03,15165.19 96.18,15175.76 98.52,15186.29 101.04,15196.78 103.74,15207.22 106.62,15217.62 109.69,15227.96 112.93,15238.25 116.35,15248.48 119.95,15258.65 123.73,15268.75 127.69,15278.79 131.81,15288.76 136.12,15298.65 140.59,15308.47 145.23,15318.21 150.05,15327.86 155.03,15337.43 160.18,15346.91 165.49,15356.3 170.96,15365.59 176.6,15374.79 182.4,15383.89 188.35,15392.89 194.46,15401.78 200.73,15410.56 207.14,15419.23 213.71,15427.79 220.43,15436.23 227.29,15444.56 234.29,15452.76 241.44,15460.84 248.73,15468.79 256.16,15476.62 263.72,15484.31 271.41,15491.88 279.24,15499.3 287.19,15506.59 295.27,15513.74 303.47,15520.74 311.8,15527.61 320.24,15534.32 328.8,15540.89 337.47,15547.31 346.25,15553.57 355.14,15559.68 364.14,15565.64 373.24,15571.43 382.44,15577.07 391.73,15582.54 401.12,15587.86 410.6,15593 420.17,15597.98 429.83,15602.8 439.56,15607.44 449.38,15611.92 459.27,15616.22 469.24,15620.35 479.28,15624.3 489.38,15628.08 499.55,15631.68 509.78,15635.1 520.07,15638.35 530.41,15641.41 540.81,15644.29 551.25,15646.99 561.74,15649.51 572.28,15651.85 582.85,15654 593.45,15655.96 604.09,15657.74 614.76,15659.34 625.46,15660.75 636.18,15661.97 646.92,15663 657.67,15663.85 668.44,15664.51 679.22,15664.98 690,15665.26 700.79,15665.35 v1(1090.55,15665.35)
  Bottom Layer w7.87: 82.68,120.08 82.68,14881.89
FPC_08: A.8 B.8 C.8 | length 18796.8
  Top Layer w3.94: 1102.36,15110.24 1102.36,15759.84
  Top Layer w7.87: 1102.36,13899.61 1102.36,15110.24 ; 1102.36,15759.84 1102.36,16415.35
  Bottom Layer w3.94: 94.49,14881.89 94.49,15047.24 94.58,15057.83 94.86,15068.4 95.32,15078.98 95.97,15089.54 96.8,15100.09 97.81,15110.62 99.01,15121.13 100.39,15131.62 101.95,15142.09 103.7,15152.53 105.63,15162.93 107.74,15173.3 110.03,15183.63 112.5,15193.92 115.15,15204.17 117.98,15214.36 120.98,15224.51 124.16,15234.6 127.52,15244.64 131.05,15254.61 134.76,15264.52 138.64,15274.37 142.69,15284.14 146.91,15293.85 151.29,15303.48 155.85,15313.03 160.57,15322.5 165.46,15331.88 170.51,15341.18 175.72,15350.39 181.09,15359.51 186.62,15368.53 192.3,15377.46 198.14,15386.28 204.14,15395 210.28,15403.62 216.58,15412.12 223.02,15420.52 229.6,15428.8 236.34,15436.97 243.21,15445.01 250.22,15452.94 257.37,15460.74 264.65,15468.41 272.07,15475.96 279.62,15483.38 287.29,15490.66 295.09,15497.81 303.02,15504.82 311.07,15511.7 319.23,15518.43 327.51,15525.01 335.91,15531.46 344.41,15537.75 353.03,15543.9 361.75,15549.89 370.57,15555.73 379.5,15561.42 388.52,15566.94 397.64,15572.31 406.85,15577.53 416.15,15582.57 425.53,15587.46 435,15592.18 444.55,15596.74 454.18,15601.13 463.89,15605.35 473.66,15609.39 483.51,15613.27 493.42,15616.98 503.4,15620.51 513.43,15623.87 523.52,15627.05 533.67,15630.06 543.87,15632.88 554.11,15635.53 564.4,15638 574.73,15640.29 585.1,15642.4 595.5,15644.33 605.94,15646.08 616.41,15647.64 626.9,15649.02 637.41,15650.22 647.94,15651.24 658.49,15652.07 669.06,15652.71 679.63,15653.17 690.21,15653.45 700.79,15653.54 v1(1102.36,15653.54)
  Bottom Layer w7.87: 94.49,120.08 94.49,14881.89
FPC_09: A.9 B.9 C.9 | length 18790.1
  Top Layer w3.94: 1114.17,15110.24 1114.17,15759.84
  Top Layer w7.87: 1114.17,13899.61 1114.17,15110.24 ; 1114.17,15759.84 1114.17,16415.35
  Bottom Layer w3.94: 106.3,14881.89 106.3,15047.24 106.39,15057.62 106.66,15067.99 107.11,15078.36 107.75,15088.71 108.56,15099.06 109.56,15109.39 110.73,15119.69 112.08,15129.98 113.62,15140.24 115.33,15150.48 117.22,15160.68 119.29,15170.85 121.54,15180.97 123.96,15191.06 126.56,15201.11 129.33,15211.11 132.28,15221.06 135.4,15230.95 138.69,15240.79 142.15,15250.57 145.78,15260.29 149.59,15269.94 153.56,15279.53 157.7,15289.04 162,15298.49 166.47,15307.85 171.09,15317.14 175.89,15326.34 180.84,15335.46 185.95,15344.49 191.21,15353.43 196.63,15362.27 202.21,15371.03 207.93,15379.68 213.81,15388.23 219.84,15396.68 226.01,15405.02 232.32,15413.25 238.78,15421.37 245.38,15429.37 252.12,15437.26 259,15445.03 266.01,15452.68 273.15,15460.21 280.42,15467.61 287.82,15474.88 295.35,15482.03 303,15489.03 310.77,15495.91 318.66,15502.65 326.66,15509.25 334.78,15515.71 343.02,15522.02 351.36,15528.2 359.8,15534.22 368.35,15540.1 377.01,15545.82 385.76,15551.4 394.6,15556.82 403.54,15562.09 412.57,15567.2 421.69,15572.15 430.9,15576.94 440.18,15581.57 449.55,15586.03 458.99,15590.34 468.5,15594.47 478.09,15598.44 487.74,15602.25 497.46,15605.88 507.24,15609.34 517.08,15612.64 526.98,15615.76 536.92,15618.7 546.92,15621.48 556.97,15624.07 567.06,15626.5 577.19,15628.74 587.35,15630.81 597.56,15632.7 607.79,15634.41 618.05,15635.95 628.34,15637.3 638.65,15638.48 648.97,15639.47 659.32,15640.28 669.67,15640.92 680.04,15641.37 690.41,15641.64 700.79,15641.73 v1(1114.17,15641.73)
  Bottom Layer w7.87: 106.3,120.08 106.3,14881.89